# Altium PCB PCB1.PcbDoc
Units mil, origin at the board's own origin, x right, y up, seen from the top; angles counter-clockwise.
Board outline 6000 x 4000 mil, 2 copper layers (Top Layer, Bottom Layer); 1 components, 0 nets, 36 pads, 0 vias.
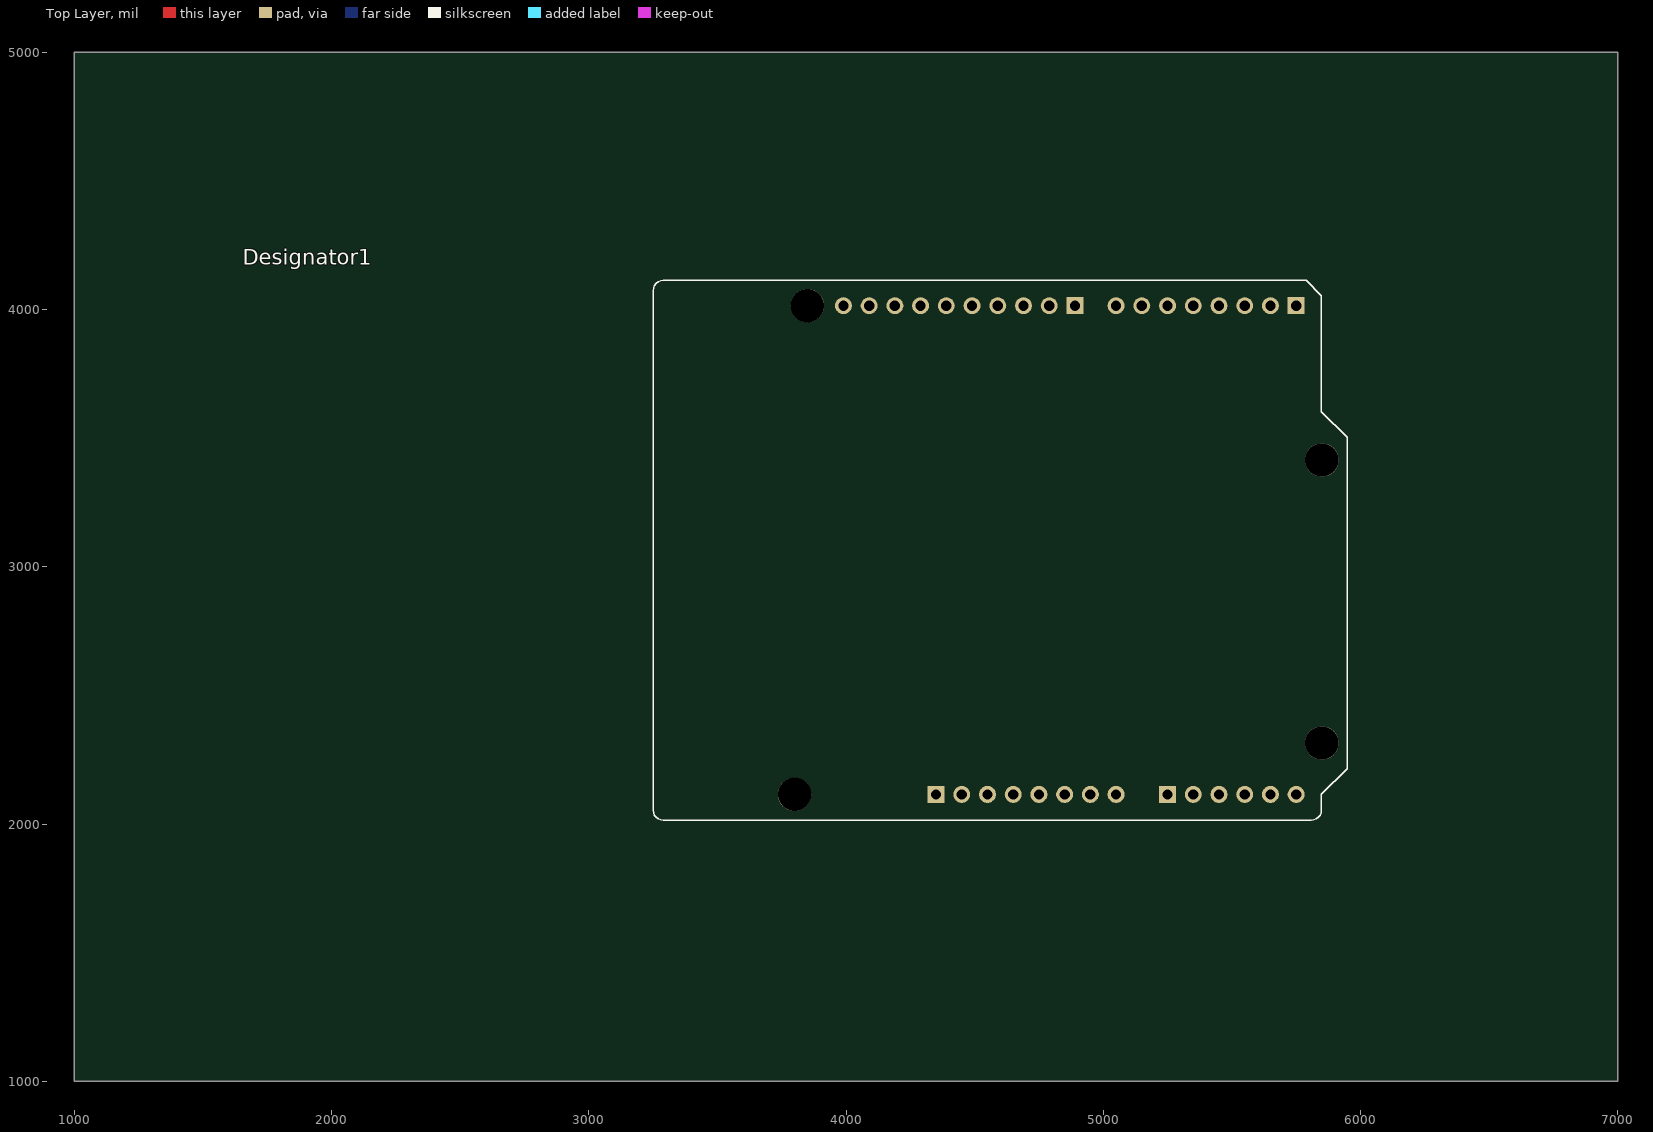
[diagram p0: Top Layer view]
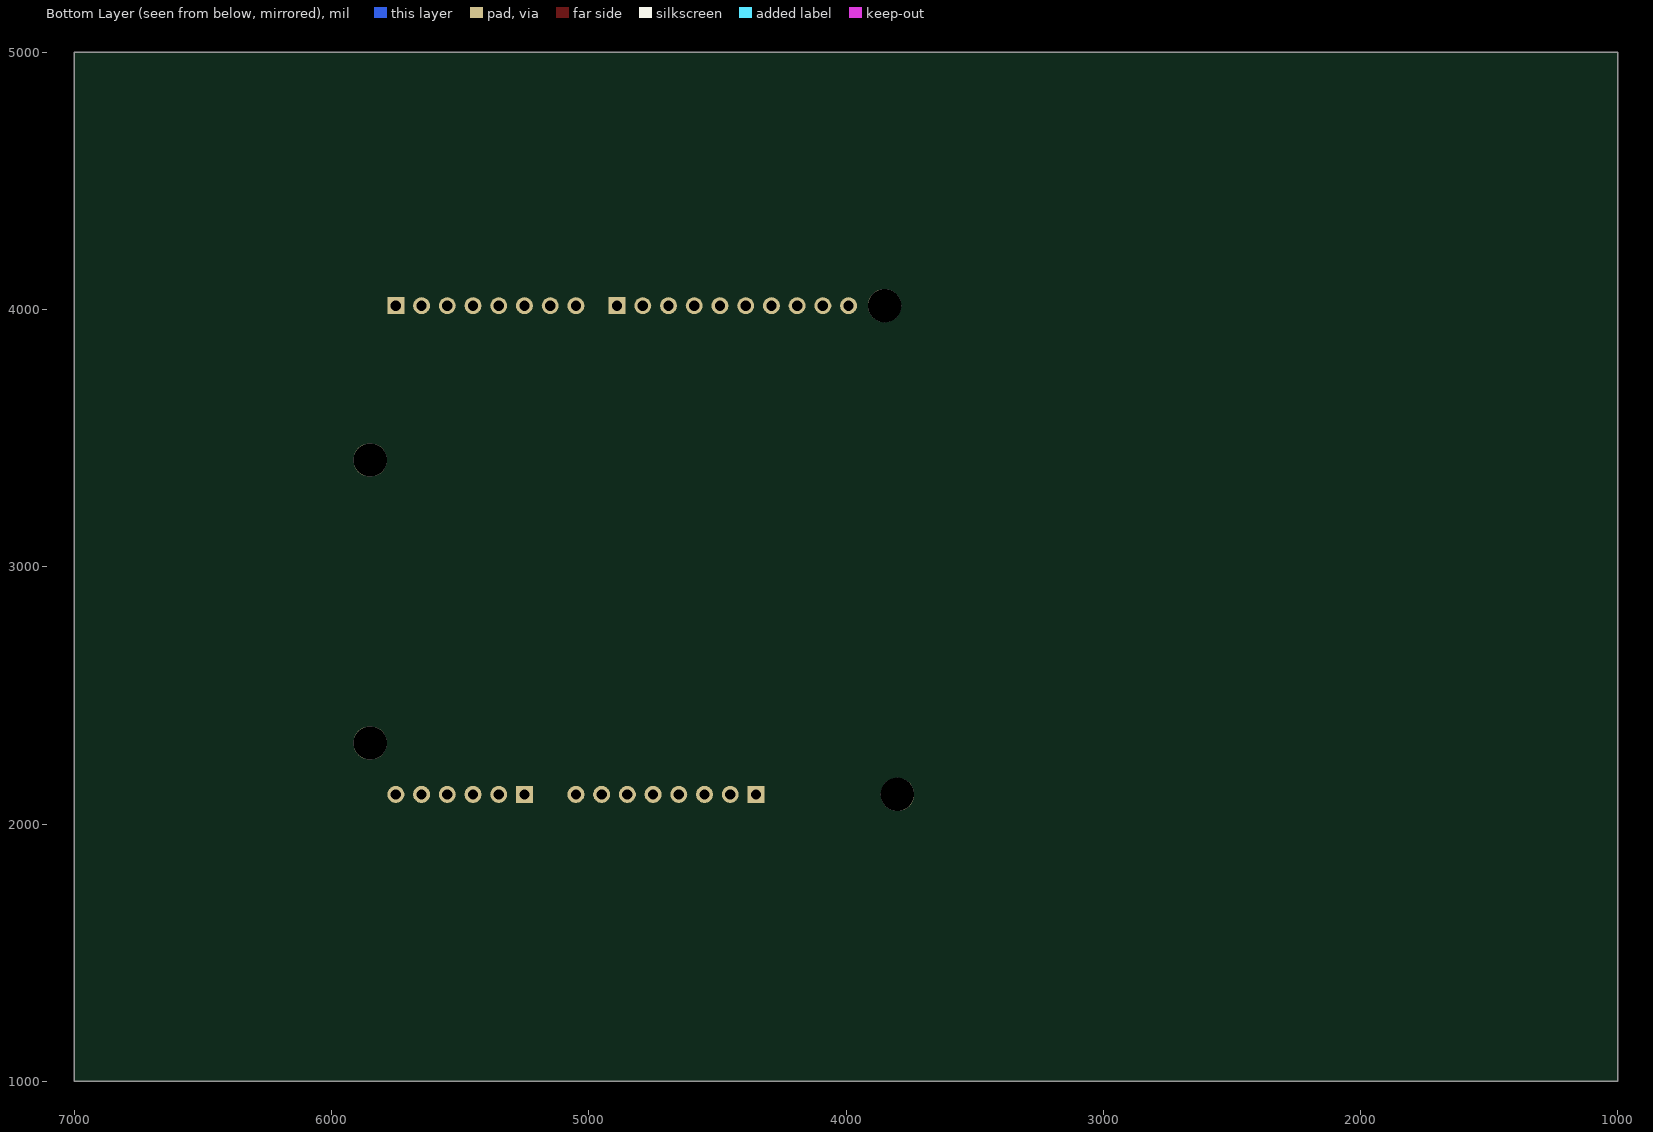
[diagram p1: Bottom Layer view, seen from below]

## Layer stack, top to bottom
Top Solder: solder mask 0.4, Solder Resist, Dk 3.5
Top Layer: signal copper 1.4
Dielectric 1: dielectric 12.6, FR-4, Dk 4.8
Bottom Layer: signal copper 1.4
Bottom Solder: solder mask 0.4, Solder Resist, Dk 3.5

## Board outline
1000,1000 7000,1000 7000,5000 1000,5000

## Design rules (kind name [scope] priority, off if disabled: settings)
Clearance [All] p1: gap=10 ignorepadtopadclearanceinfootprint=FALSE except(0: Arc-Hole Track-Hole SMDPad-Hole THPad-Hole Via-Hole Fill-Hole Poly-Hole Region-Hole Text-Hole)
PolygonConnect [All] p1: connectstyle=Relief reliefconductorwidth=10 reliefentries=4 polygonreliefangle="90 Angle" airgapwidth=10
RoutingVias [All] p1: holewidth=28 width=50 viastyle="Through Hole" minholewidth=28 minwidth=50 maxholewidth=28 maxwidth=50
SolderMaskExpansion [All] p1: expansion=4 istentingtop=FALSE
Width [All] p1: maxlimit=10 minlimit=10 preferedwidth=10
30 further rules are at their usual default settings.

## Components (designator, comment, footprint, x,y, rotation, side; value= is the part's Value field where it differs from the comment)
Designator1 "Comment" ARDUINO_A000066 3250,2015 r0 top

## Footprints (in the part's own frame and the unit in brackets; to place one, negate y for a bottom-side part, rotate by r counter-clockwise, add the part's x,y. Pads: shape width x height; smd on the part's side, far side on the other; paste and mask are expansions set on the pad)
ARDUINO_A000066 [mil]
  round 66 hole 40: 3V3(1400,100) 5V(1500,100) A1(2100,100) A2(2200,100) A3(2300,100) A4(2400,100) A4(SDA)(840,2000) A5(2500,100) A5(SCL)(740,2000) AREF(940,2000) D1(2400,2000) D2(2300,2000) D3(2200,2000) D4(2100,2000) D5(2000,2000) D6(1900,2000) D7(1800,2000) D9(1540,2000) D10(1440,2000) D11(1340,2000) D12(1240,2000) D13(1140,2000) GND_1(1700,100) GND_2(1600,100) GND_3(1040,2000) IOREF(1200,100) RST(1300,100) VIN(1800,100)
  rect 66x66 / inner round 66 / far side rect 66x66 hole 40: A0(2000,100) D0(2500,2000) D8(1640,2000) P1(1100,100)
  round 129.92 hole 129.92 unplated: ""(550,100) ""(600,2000) ""(2600,300) ""(2600,1400)
  silkscreen extent 0,0 2698,2098, body extent -1606,-1050 1350,1050, height 467

## Nets (pads, with @x,y where several pads share a name; then routed paths per layer and width w, separated by ;. In a path a pad name is that pad's centre, name@x,y a point inside that pad or via, vN(x,y) a via of type N, cw(c..) or ccw(c..) an arc to the next point about the centre after c; other vN are vias at no path point)
pads on no net: Designator1. Designator1.3V3 Designator1.5V Designator1.A0 Designator1.A1 Designator1.A2 Designator1.A3 Designator1.A4 Designator1.A4(SDA) Designator1.A5 Designator1.A5(SCL) Designator1.AREF Designator1.D0 Designator1.D1 Designator1.D2 Designator1.D3 Designator1.D4 Designator1.D5 Designator1.D6 Designator1.D7 Designator1.D8 Designator1.D9 Designator1.D10 Designator1.D11 Designator1.D12 Designator1.D13 Designator1.GND_1 Designator1.GND_2 Designator1.GND_3 Designator1.IOREF Designator1.P1 Designator1.RST Designator1.VIN